# Altium PCB PCB1.pcbdoc
Units mil, origin at the board's own origin, x right, y up, seen from the top; angles counter-clockwise.
Board outline 3445.56 x 2675.56 mil, 2 copper layers (Top Layer, Bottom Layer); 55 components, 52 nets, 276 pads, 218 vias.
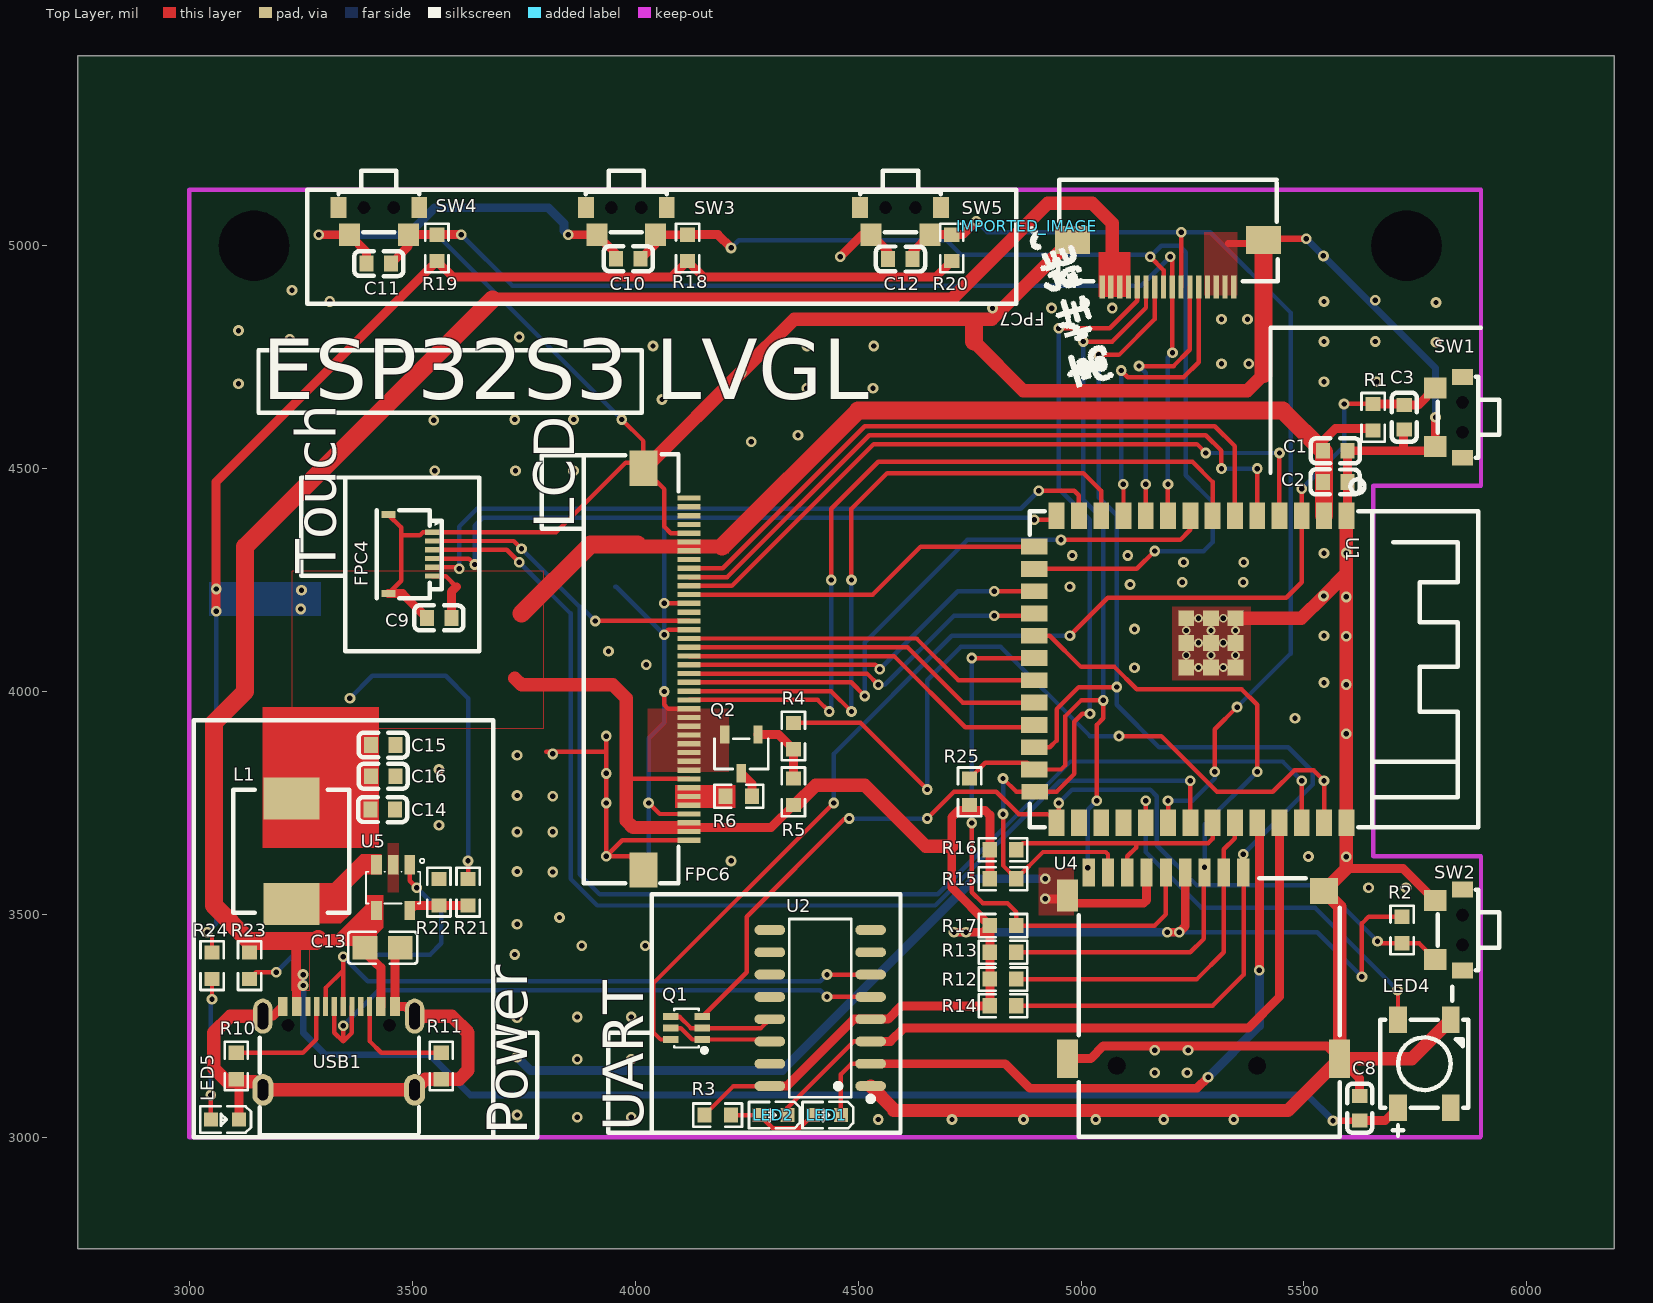
[diagram p0: Top Layer view]
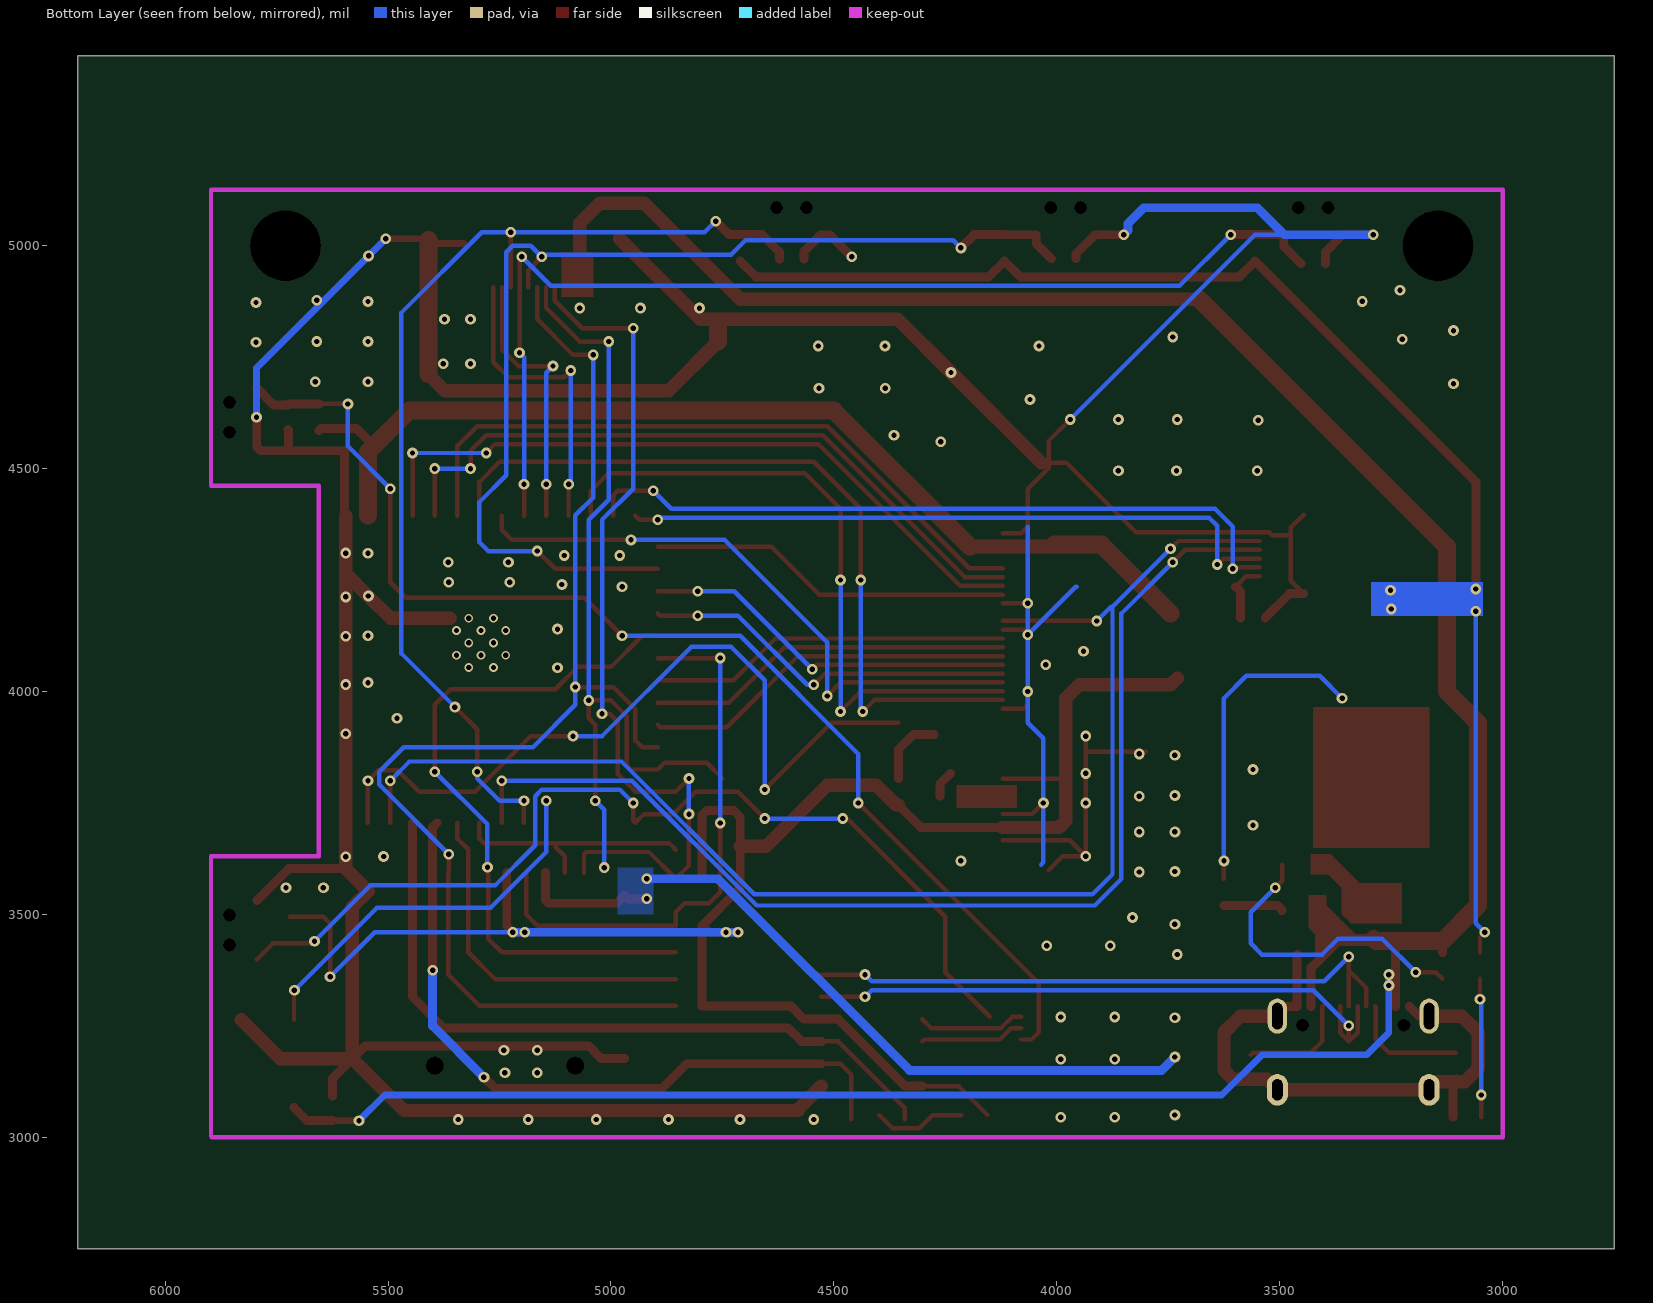
[diagram p1: Bottom Layer view, seen from below]

## Layer stack, top to bottom
Top Layer: signal copper (thickness not stored)
Dielectric: dielectric 12.6, FR-4, Dk 4.8
Bottom Layer: signal copper (thickness not stored)

## Board outline
6195.56,2750 2750,2750 2750,5425.56 6195.56,5425.56
cut-out: 3223.74,5000 ccw(c3145,5000) 3066.26,5000 ccw(c3145,5000)
cut-out: 5808.74,5000 ccw(c5730,5000) 5651.26,5000 ccw(c5730,5000)

## Components (designator, comment, footprint, x,y, rotation, side; value= is the part's Value field where it differs from the comment)
C1 "CC0603KRX7R9BB104" C0603 5570,4470 r0 top
C2 "CL10A226MP8NUNE" C0603 5570,4540 r180 top
C3 "CL10A105KB8NNNC" C0603 5725,4615 r270 top
C8 "CC0603KRX7R9BB104" C0603 5625,3065 r270 top
C9 "CC0603KRX7R9BB104" C0603 3560,4165 r0 top
C10 "CC0603KRX7R9BB104" C0603 3984.39,4970.64 r180 top
C11 "CC0603KRX7R9BB104" C0603 3424.7,4960 r180 top
C12 "CC0603KRX7R9BB104" C0603 4594.69,4970.21 r180 top
C13 "CL21A475KAQNNNE" C0805 3433.4,3425.21 r180 top
C14 "CL10A106MQ8NNNC" C0603 3433.71,3735 r0 top
C15 "CL10A226MQ8NRNC" C0603 3434.39,3880 r180 top
C16 "CL10A226MQ8NRNC" C0603 3434.39,3810 r180 top
FPC4 "HC-FPC-05-09-6RLTAG" FPC-SMD_6P-P0.50_HC-FPC-05-09-6RLTAG 3495.51,4308.07 r90 top
FPC6 "AFC01-S40FCA-00" FPC-SMD_P0.50-40P_FGS-XJ-H2.0 4069.51,4050 r90 top
FPC7 "AFC01-S16FCA-00" FPC-SMD_P0.50-16P_FGS-XJ-H2.0 5195,4960 r0 top
IMPORTED_IMAGE "IMPORTED_IMAGE" IMPORTED_IMAGE 4878.84,5043.78 r0 top
L1 "FXL0630-2R2-M" IND-SMD_L7.0-W6.6 3228.71,3641.61 r90 top
LED1 "NCD0603R1_C84263" LED0603-RD_RED 4430,3050 r180 top
LED2 "NCD0603R1_C84263" LED0603-RD_RED 4310,3050 r180 top
LED4 "XL-5050RGBC-WS2812B" LED-SMD_4P-L5.0-W5.0-BL_XL-5050RGBC 5770,3165 r0 top
LED5 "NCD0603R1_C84263" LED0603-RD_RED 3079.4,3040 r180 top
Q1 "2N7002DWH6327" SOT-363_L2.0-W1.3-P0.65-LS2.1-BR 4115,3245 r0 top
Q2 "S8050 J3Y_C2146" SOT-23-3_L3.0-W1.7-P0.95-LS2.9-BR 4238.08,3860 r90 top
R1 "0603WAF1002T5E" R0603 5655,4615 r90 top
R2 "0603WAF1002T5E" R0603 5720,3465 r270 top
R3 "0603WAF4701T5E" R0603 4185,3050 r0 top
R4 "0603WAF2200T5E" R0603 4355,3900 r270 top
R5 "0603WAF1002T5E" R0603 4355,3775 r270 top
R6 "0603WAF100KT5E" R0603 4232.53,3765 r180 top
R10 "0603WAF5101T5E" R0603 3105,3160 r270 top
R11 "0603WAF5101T5E" R0603 3565,3160 r270 top
R12 "0603WAF1002T5E" R0603 4825,3355 r180 top
R13 "0603WAF1002T5E" R0603 4825,3415 r180 top
R14 "0603WAF1002T5E" R0603 4825,3295 r180 top
R15 "0603WAF1002T5E" R0603 4825,3580 r180 top
R16 "0603WAF1002T5E" R0603 4825,3645 r180 top
R17 "0603WAF1002T5E" R0603 4825,3475 r180 top
R18 "0603WAF1002T5E" R0603 4117.27,4995 r90 top
R19 "0603WAF1002T5E" R0603 3555,4995 r90 top
R20 "0603WAF1002T5E" R0603 4710,4995 r90 top
R21 "0603WAF2003T5E" R0603 3625,3550 r90 top
R22 "0603WAF4422T5E" R0603 3559.7,3550 r270 top
R23 "0603WAF1002T5E" R0603 3135,3385 r90 top
R24 "0603WAF1002T5E" R0603 3050.71,3385 r270 top
R25 "0603WAF1002T5E" R0603 4750,3775 r90 top
SW1 "TS24CA" SW-SMD_TS24CA#1 5825,4615 r270 top
SW2 "TS24CA" SW-SMD_TS24CA#1 5825,3465 r270 top
SW3 "TS24CA" SW-SMD_TS24CA#2 3980,5055 r0 top
SW4 "TS24CA" SW-SMD_TS24CA#2 3425,5055 r0 top
SW5 "TS24CA" SW-SMD_TS24CA#2 4595,5055 r0 top
U1 "ESP32-S3-WROOM-1-N16R8" WIRELM-SMD_ESP32-S3-WROOM-1 5245,4050 r270 top
U2 "CH340C" SOP-16_L10.0-W3.9-P1.27-LS6.0-BL 4415,3290 r90 top
U4 "XDFP-0090-012" SIM-SMD_LX_XDFP-0090-012 5275,3385 r0 top
U5 "TLV62569DBVR" SOT-23-5_L3.0-W1.7-P0.95-LS2.8-BR 3457.03,3560 r90 top
USB1 "TYPE-C 16PIN 2MD(073)" USB-C-SMD_TYPE-C-6PIN-2MD-073 3335,3200 r0 top

## Footprints (in the part's own frame and the unit in brackets; to place one, negate y for a bottom-side part, rotate by r counter-clockwise, add the part's x,y. Pads: shape width x height; smd on the part's side, far side on the other; paste and mask are expansions set on the pad)
C0603 [mm]
  rect 0.8x0.9 smd: 1(-0.7,0) 2(0.7,0)
  silkscreen extent -1.41,-0.71 1.39,0.72
C0805 [mm]
  rect 1.41x1.35 smd: 1(-1,0) 2(1,0)
  silkscreen extent -1.96,-0.9 1.96,0.9
FPC-SMD_6P-P0.50_HC-FPC-05-09-6RLTAG [mm]
  rect 0.3x0.8 smd: 1(1.25,-1.25) 2(0.75,-1.25) 3(0.25,-1.25) 4(-0.25,-1.25) 5(-0.75,-1.25) 6(-1.25,-1.25)
  rect 0.4x0.8 smd: 7(-2.25,1.25) 8(2.25,1.25)
  silkscreen extent -2.5,-1.78 2.5,1.91
FPC-SMD_P0.50-16P_FGS-XJ-H2.0 [mm]
  rect 0.3x1.3 smd: 1(-3.752,-1.34) 2(-3.254,-1.338) 3(-2.752,-1.34) 4(-2.252,-1.34) 5(-1.752,-1.34) 6(-1.252,-1.34) 7(-0.752,-1.34) 8(-0.252,-1.34) 9(0.248,-1.34) 10(0.748,-1.34) 11(1.248,-1.34) 12(1.748,-1.34) 13(2.248,-1.34) 14(2.748,-1.34) 15(3.248,-1.34) 16(3.748,-1.34)
  rect 2x1.6 smd: 17(-5.45,1.34) 18(5.45,1.34)
  silkscreen extent -6.25,-2.4 6.25,4.76
FPC-SMD_P0.50-40P_FGS-XJ-H2.0 [mm]
  rect 0.3x1.3 smd: 1(9.75,-1.3) 2(9.25,-1.3) 3(8.75,-1.3) 4(8.25,-1.3) 5(7.75,-1.3) 6(7.25,-1.3) 7(6.75,-1.3) 8(6.25,-1.3) 9(5.75,-1.3) 10(5.25,-1.3) 11(4.75,-1.3) 12(4.25,-1.3) 13(3.75,-1.3) 14(3.25,-1.3) 15(2.75,-1.3) 16(2.25,-1.3) 17(1.75,-1.3) 18(1.25,-1.3) 19(0.75,-1.3) 20(0.25,-1.3) 21(-0.25,-1.3) 22(-0.75,-1.3) 23(-1.25,-1.3) 24(-1.75,-1.3) 25(-2.25,-1.3) 26(-2.75,-1.3) 27(-3.25,-1.3) 28(-3.75,-1.3) 29(-4.25,-1.3) 30(-4.75,-1.3) 31(-5.25,-1.3) 32(-5.75,-1.3) 33(-6.25,-1.3) 34(-6.75,-1.3) 35(-7.25,-1.3) 36(-7.75,-1.3) 37(-8.25,-1.3) 38(-8.75,-1.3) 39(-9.25,-1.3) 40(-9.75,-1.3)
  rect 2x1.6 smd: 41(-11.45,1.3) 42(11.45,1.3)
  silkscreen extent -12.2,-0.7 12.25,4.7
IMPORTED_IMAGE [mil]
  silkscreen extent 0,-363 194,0
IND-SMD_L7.0-W6.6 [mm]
  rect 2.4x3.2 smd: 1(-3,0) 2(3,0)
  silkscreen extent -3.5,-3.3 3.5,3.3
LED0603-RD_RED [mm]
  rect 0.8x0.8 smd: 1(-0.8,-0.003) 2(0.8,0.003)
  silkscreen extent -1.49,-0.75 1.39,0.76
LED-SMD_4P-L5.0-W5.0-BL_XL-5050RGBC [mm]
  rect 1x1.5 smd: 1(-1.5,-2.5) 2(1.5,-2.5) 3(1.5,2.5) 4(-1.5,2.5)
  silkscreen extent -2.5,-4.1 2.5,4.4
R0603 [mil]
  rect 31.75x34.02 smd: 1(-29.66,0) 2(29.66,0)
  silkscreen extent -55,-26 55,26
SIM-SMD_LX_XDFP-0090-012 [mm]
  rect 0.7x1.6 smd: 1(2.25,5.3) 2(1.15,5.3) 3(0.05,5.3) 4(-1.05,5.3) 5(-2.15,5.3) 6(-3.25,5.3) 7(-4.35,5.3) 8(-5.45,5.3) 9(-6.55,5.3)
  rect 1.2x2.2 smd: 10(-7.75,-5.3) 10(7.75,-5.3)
  rect 1.2x1.8 smd: 10(-7.75,4)
  rect 1.6x1.5 smd: 10(6.85,4.25)
  Multi-Layer board cut-out: 3.55,-5.7 3.501,-5.483 3.362,-5.309 3.161,-5.212 2.939,-5.212 2.738,-5.309 2.6,-5.483 2.55,-5.7 2.55,-5.7 2.6,-5.917 2.738,-6.091 2.939,-6.187 3.161,-6.187 3.362,-6.091 3.501,-5.917 3.55,-5.7
  Multi-Layer board cut-out: -4.45,-5.7 -4.499,-5.483 -4.638,-5.309 -4.839,-5.212 -5.061,-5.212 -5.262,-5.309 -5.4,-5.483 -5.45,-5.7 -5.45,-5.7 -5.4,-5.917 -5.262,-6.091 -5.061,-6.187 -4.839,-6.187 -4.638,-6.091 -4.499,-5.917 -4.45,-5.7
  silkscreen extent -7.11,-9.74 7.74,4.99
SOP-16_L10.0-W3.9-P1.27-LS6.0-BL [mm]
  oval 0.56x1.745 smd: 1(-4.445,-2.872) 2(-3.175,-2.872) 3(-1.905,-2.872) 4(-0.635,-2.872) 5(0.635,-2.872) 6(1.905,-2.872) 7(3.175,-2.872) 8(4.445,-2.872) 9(4.445,2.872) 10(3.175,2.872) 11(1.905,2.872) 12(0.635,2.872) 13(-0.635,2.872) 14(-1.905,2.872) 15(-3.175,2.872) 16(-4.445,2.872)
  silkscreen extent -5.33,-3.02 5.08,1.77
SOT-23-3_L3.0-W1.7-P0.95-LS2.9-BR [mil]
  rect 40.85x20.95 smd: 1(43.36,-37.4) 2(43.36,37.4) 3(-43.36,0)
  silkscreen extent -34,-60 34,60
SOT-23-5_L3.0-W1.7-P0.95-LS2.8-BR [mm]
  rect 1.1x0.6 smd: 1(1.3,-0.95) 2(1.3,0) 3(1.3,0.95) 4(-1.3,0.95) 5(-1.3,-0.95)
  silkscreen extent -0.9,-1.78 1.65,1.55
SOT-363_L2.0-W1.3-P0.65-LS2.1-BR [mm]
  rect 0.9x0.4 smd: 1(0.9,-0.65) 2(0.9,0) 3(0.9,0.65) 4(-0.9,0.65) 5(-0.9,0) 6(-0.9,-0.65)
  silkscreen extent -0.7,-1.4 1.14,1.1
SW-SMD_TS24CA#1 [mm]
  rect 0.9x1.2 smd: 1(-2.3,0.775) 2(2.3,0.775)
  rect 1.2x1.3 smd: 3(-1.675,-0.775) 4(1.675,-0.775)
  Multi-Layer board cut-out: -0.85,1.125 -1.002,1.09 -1.124,0.993 -1.191,0.853 -1.191,0.697 -1.124,0.557 -1.002,0.46 -0.85,0.425 -0.85,0.425 -0.698,0.46 -0.576,0.557 -0.509,0.697 -0.509,0.853 -0.576,0.993 -0.698,1.09 -0.85,1.125
  Multi-Layer board cut-out: 0.85,1.125 0.698,1.09 0.576,0.993 0.509,0.853 0.509,0.697 0.576,0.557 0.698,0.46 0.85,0.425 0.85,0.425 1.002,0.46 1.124,0.557 1.191,0.697 1.191,0.853 1.124,0.993 1.002,1.09 0.85,1.125
  silkscreen extent -2.3,-0.62 2.3,2.88
SW-SMD_TS24CA#2 [mm]
  rect 0.9x1.2 smd: 1(-2.3,0.775) 2(2.3,0.775)
  rect 1.2x1.3 smd: 3(-1.675,-0.775) 4(1.675,-0.775)
  Multi-Layer board cut-out: -0.5,0.775 -0.535,0.927 -0.632,1.049 -0.772,1.116 -0.928,1.116 -1.068,1.049 -1.165,0.927 -1.2,0.775 -1.2,0.775 -1.165,0.623 -1.068,0.501 -0.928,0.434 -0.772,0.434 -0.632,0.501 -0.535,0.623 -0.5,0.775
  Multi-Layer board cut-out: 1.2,0.775 1.165,0.927 1.068,1.049 0.928,1.116 0.772,1.116 0.632,1.049 0.535,0.927 0.5,0.775 0.5,0.775 0.535,0.623 0.632,0.501 0.772,0.434 0.928,0.434 1.068,0.501 1.165,0.623 1.2,0.775
  silkscreen extent -2.3,-0.62 2.3,2.88
USB-C-SMD_TYPE-C-6PIN-2MD-073 [mm]
  rect 0.55x1.1 smd: 1(-3.2,2.375) 2(-2.4,2.375) 11(2.4,2.375) 12(3.2,2.375)
  rect 0.3x1.1 smd: 3(-1.75,2.375) 4(-1.25,2.375) 5(-0.75,2.375) 6(-0.25,2.375) 7(0.25,2.375) 8(0.75,2.375) 9(1.25,2.375) 10(1.75,2.375)
  oval 1.1x2 hole 0.6 slot 1.5 at 90 deg: 13(-4.325,1.825) 14(4.325,1.825)
  oval 1.2x1.8 hole 0.6 slot 1.2 at 90 deg: 13(-4.325,-2.375) 14(4.325,-2.375)
  Multi-Layer board cut-out: -2.54,1.305 -2.575,1.457 -2.672,1.579 -2.812,1.646 -2.968,1.646 -3.108,1.579 -3.205,1.457 -3.24,1.305 -3.24,1.305 -3.205,1.153 -3.108,1.031 -2.968,0.964 -2.812,0.964 -2.672,1.031 -2.575,1.153 -2.54,1.305
  Multi-Layer board cut-out: 3.24,1.305 3.205,1.457 3.108,1.579 2.968,1.646 2.812,1.646 2.672,1.579 2.575,1.457 2.54,1.305 2.54,1.305 2.575,1.153 2.672,1.031 2.812,0.964 2.968,0.964 3.108,1.031 3.205,1.153 3.24,1.305
  silkscreen extent -4.5,-4.97 4.57,0.6
WIRELM-SMD_ESP32-S3-WROOM-1 [mm]
  rect 1.5x0.9 smd: 1(-8.75,8.895) 2(-8.75,7.625) 3(-8.75,6.355) 4(-8.75,5.085) 5(-8.75,3.815) 6(-8.75,2.545) 7(-8.75,1.275) 8(-8.75,0.005) 9(-8.75,-1.265) 10(-8.75,-2.535) 11(-8.75,-3.805) 12(-8.75,-5.075) 13(-8.75,-6.345) 14(-8.75,-7.615) 27(8.75,-7.615) 28(8.75,-6.345) 29(8.75,-5.075) 30(8.75,-3.805) 31(8.75,-2.535) 32(8.75,-1.265) 33(8.75,0.005) 34(8.75,1.275) 35(8.75,2.545) 36(8.75,3.815) 37(8.75,5.085) 38(8.75,6.355) 39(8.75,7.625) 40(8.75,8.895)
  rect 0.9x1.5 smd: 15(-6.985,-8.895) 16(-5.715,-8.895) 17(-4.445,-8.895) 18(-3.175,-8.895) 19(-1.905,-8.895) 20(-0.635,-8.895) 21(0.635,-8.895) 22(1.905,-8.895) 23(3.175,-8.895) 24(4.445,-8.895) 25(5.715,-8.895) 26(6.985,-8.865)
  rect 0.9x0.9 smd: 41(-2.9,1.175) 41(-2.9,2.575) 41(-2.9,-0.225) 41(-1.5,2.575) 41(-1.5,1.175) 41(-1.5,-0.225) 41(-0.1,2.575) 41(-0.1,1.175) 41(-0.1,-0.225)
  silkscreen extent -10.82,-9.14 9.02,16.39

## Via types
v1: diameter 24.02, hole 12.01, Top Layer to Bottom Layer, 206 vias
v2: diameter 19.69, hole 11.81, Top Layer to Bottom Layer, 12 vias

## Nets (pads, with @x,y where several pads share a name; then routed paths per layer and width w, separated by ;. In a path a pad name is that pad's centre, name@x,y a point inside that pad or via, vN(x,y) a via of type N, cw(c..) or ccw(c..) an arc to the next point about the centre after c; other vN are vias at no path point)
3V3: C1.1 C2.2 C9.2 C14.1 C15.2 C16.2 FPC4.6 FPC6.6 FPC6.7 FPC6.33 FPC6.38 FPC6.39 L1.2 R1.1 R2.1 R3.1 R5.2 R12.2 R13.2 R14.2 R15.2 R16.2 R17.2 R18.1 R19.1 R20.1 R21.2 R24.1 R25.1 U1.2 U2.4 U2.16 U4.4 | length 10330.2
  Top Layer w10: v1(3040,3460) 3050.71,3449.29 R24.1 ; FPC4.6 3575,4258.85 3598.86,4235 ; R21.2 v1(3625,3620) ; 3990,3803.94 FPC6.33 ; R3.1 4220.34,3115 U2.16 ; v1(5630,3360) 5630,3479.66 5645,3494.66 R2.1
  Top Layer w20: v1(3060,4180) v1(3060,4230) 3060,4470.34 R19.1 3590.34,4930 4081.93,4930 R18.1 4152.61,4930 4674.66,4930 R20.1 ; C9.2 3587.56,4223.7 3598.86,4235 ; 4122.15,3695 4304.66,3695 R5.2 ; U2.16 4340,3115 4490,3265 U2.4 4567.14,3265 4597.14,3295 R14.2 R12.2 R13.2 R17.2 ; v1(4715,3460) v1(4741.9,3460) 4780.34,3460 R17.2 ; R15.2 R16.2 4795.34,3722.67 4785,3733.01 4725,3733.01 4710,3718.01 4710,3653.19 4710,3560.34 R17.2 ; v1@5195,3460 v1(5220,3460) 5233.66,3473.66 U4.4 ; C2.2 5542.44,4561.38 5571.06,4590 5650.34,4590 R1.1
  Top Layer w30: 3730,4030 3745,4015 3950,4015 3980,3985 3980,3710 3995,3695 4122.15,3695 ; R5.2 4360.34,3745.34 4405,3790 4515,3790 4651.81,3653.19 4710,3653.19
  Top Layer w40: 3745,4175 3900,4330 4005,4330 ; 4195,4325 4500,4630 5452.44,4630 C2.2 5545.19,4537.24 U1.2
  Bottom Layer w10: v1(3040,3460) 3060,3480 v1(3060,4180) ; v1(3360,3985) 3410,4035 3575,4035 3625,3985 v1(3625,3620) ; v1(5220,3460) 5530,3460 v1(5630,3360)
  Bottom Layer w20: v1(4715,3460) v1(4741.9,3460) v1(5193.5,3460) v1(5220,3460)
  other v1: 3250,4185 3251.31,4227.34
$1N3136: LED1.2 LED2.2 R3.2 | length 208.7
  Top Layer w10: R3.2 4214.8,3049.86 LED2.2 4308.39,3020 4368.66,3020 LED1.2
$1N4482: Q2.3 R6.1 | length 61.6
  Top Layer w20: Q2.3 4262.19,3792.54 R6.1
$1N4584: Q2.1 R4.2 R5.1 | length 158.9
  Top Layer w20: Q2.1 4321.98,3903.36 R4.2 R5.1
$1N6260: R10.1 USB1.4 | length 266.4
  Top Layer w10: R10.1 3254.66,3189.66 3285,3220 3285,3292.71 USB1.4
$1N6275: R11.1 USB1.10 | length 251.5
  Top Layer w10: USB1.10 3405,3292.41 3405,3215 3430,3190 3559.66,3190 R11.1@3565,3184.66
$1N13069: L1.1 U5.3
$1N13305: R23.1 U5.1 | length 697.4
  Top Layer w10: R23.1 3149.66,3370 v1(3195,3370) ; U5.1 3494.43,3575.57 v1(3510,3560)
  Bottom Layer w10: v1(3195,3370) 3270,3445 3370,3445 3405,3410 3540,3410 3565,3435 3565,3505 v1(3510,3560)
$1N13462: LED5.2 R24.2 | length 311.6
  Top Layer w10: LED5.2@3047.93,3044.86 v1(3047.93,3095) ; v1(3050.71,3310) R24.2
  Bottom Layer w10: v1(3047.93,3095) 3047.93,3307.21 v1(3050.71,3310)
$1N13468: R21.1 R22.2 U5.5 | length 135.3
  Top Layer w20: U5.5 3505.95,3520.34 R22.2 R21.1
+5V: C8.2 C13.2 FPC7.1 FPC7.2 FPC7.3 FPC7.4 LED4.1 R23.2 U5.4 USB1.2 USB1.11 | length 6639
  Top Layer w15: v1(5565,3037.44) C8.2
  Top Layer w20: R23.2 3135,3440 ; 3240,3440 3240,3294.02 USB1.2 ; 3289.05,3445 3365,3445 3429.49,3380.51 USB1.11 ; C8.2 5681.81,3037.44 LED4.1
  Top Layer w30: 3680,4880 4710,4880 4925,5095 5025,5095 5070,5050 5070,4910 5075,4905
  Top Layer w40: 3289.05,3445 3284.05,3440 3240,3440 3135,3440 3055,3520 3055,3930 3125,4000 3125,4325 3680,4880
  Bottom Layer w15: v1(3255,3365) v1(3255,3340.67) 3255,3235 3305,3185 3540,3185 3630,3095 5507.44,3095 v1(5565,3037.44)
DN: U2.6 USB1.5 USB1.7 | length 1420.8
  Top Layer w10: USB1.5 3305.47,3335 3344.84,3374.37 ; USB1.7 3344.84,3374.37 ; v1(3345,3405) 3345,3374.53 3344.84,3374.37 ; v1(4430,3365) U2.6
  Bottom Layer w10: v1(3345,3405) 3400,3350 4415,3350 v1(4430,3365)
DP: U2.5 USB1.6 USB1.8 | length 1430.8
  Top Layer w10: USB1.6 3325.16,3234.84 3345,3215 ; v1(3345,3250) 3345,3215 ; USB1.8 3364.53,3234.53 3345,3215 ; v1(4430,3315) U2.5
  Bottom Layer w10: v1(3345,3250) 3425,3330 4415,3330 v1(4430,3315)
DTR: Q1.2 Q1.4 U2.13 | length 241.2
  Top Layer w10: Q1.4 4099.41,3270.59 4125,3245 Q1.2 4281.91,3245 U2.13
EN: C3.1 Q1.6 R1.2 SW1.3 U1.3 | length 2708.4
  Top Layer w10: Q1.6 4056.85,3219.41 4040,3236.26 4040,3345 v1(4445,3750) ; v1(4975,4125) 5060,4210 5460,4210 5495,4245 5495,4394.3 U1.3 5495,4394.69 v1(5495,4455) ; v1(5590,4645) 5654.66,4645 R1.2
  Top Layer w20: R1.2 5722.9,4644.66 C3.1 5756.11,4642.56 SW1.3
  Bottom Layer w10: v1(4445,3750) 4445,3860 4710,4125 v1(4975,4125) ; v1(5495,4455) 5590,4550 v1(5590,4645)
GND: C1.2 C2.1 C3.2 C8.1 C9.1 C10.2 C11.2 C12.2 C13.1 C14.2 C15.1 C16.1 FPC4.1 FPC4.7 FPC4.8 FPC6.5 FPC6.13 FPC6.16 FPC6.25 FPC6.26 FPC6.27 FPC6.28 FPC6.29 FPC6.30 FPC6.31 FPC6.32 FPC6.37 FPC6.40 FPC6.41 FPC6.42 FPC7.13 FPC7.14 FPC7.15 FPC7.16 FPC7.17 FPC7.18 LED4.3 LED5.1 Q2.2 R10.2 R11.2 R22.1 SW1.4 SW2.3 SW3.3 SW4.3 SW5.3 U1.1 U1.40 U1.41 U2.1 U4.6 U4.10 U5.2 USB1.1 USB1.12 USB1.13 USB1.14 | length 15242.4
  Top Layer w10: FPC4.7 3475,4248.19 3475,4350 ; FPC4.8 3475,4367.95 3475,4350 ; 3800,3864.64 3935,3864.64 ; v1(3935,3900) 3935,3864.64 ; v1(3970,4610) 4018.33,4561.67 FPC6.42@4018.33,4513.29 ; FPC6.41 3987.36,3630.18 v1(3935,3630.18) ; v1(4030,3750) 4054.8,3725.2 FPC6.37 ; FPC6.42@4034.88,4513.29 FPC6.42@4018.33,4513.29 ; v1(4065,4000) 4065,3970 4073.58,3961.42 FPC6.25 ; v1@4065,4130 4073.58,4138.58 FPC6.16 ; v1(4065,4197.62) FPC6.13 ; FPC6.40 3970.96,3666.14 v1(3935,3630.18) ; FPC6.5 4079.88,4355.12 4065,4370 4065,4454.12 FPC6.42 FPC6.42@4018.33,4513.29 ; 3475,4350 3516.69,4350 3523.98,4357.28 FPC4.1 3822.28,4357.28 3978.29,4513.29 FPC6.42@4018.33,4513.29 ; v1(3935,3630.18) v1(3935,3750) v1(3935,3816.25) 3935,3864.64
  Top Layer w15: 5330,5005 5398.49,5005 5409.18,5015.69 v1(5505,5015.69)
  Top Layer w20: R10.2 3110.34,3125 3110.89,3124.45 LED5.1@3110.89,3045.13 ; USB1.13@3164.72,3271.86 3187.36,3271.86 USB1.1 ; v1(3290,5024.49) SW4.3 3397.14,4986.41 C11.2 ; FPC4.7 3477.95,4219.48 C9.1 ; C13.1@3460,3410 3460.99,3409.01 USB1.12 3483.62,3293.51 USB1.14@3505.28,3271.86 ; v1(3850,5024.49) SW3.3 3956.83,4981.72 C10.2 ; v1(4460,4975) 4509.49,5024.49 SW5.3 4567.14,4986.41 C12.2 ; v1(4920,3535) 4962.4,3535 4969.88,3542.49 4987.36,3525 5140,3525 5147.05,3532.05 U4.6 ; U4.10@4969.88,3176.34 5021.34,3176.34 5050,3205 5551.45,3205 5580.12,3176.34 5625,3131.45 C8.1 ; 5595.19,3602.83 5722.6,3602.83 SW2.3 ; U1.1 5597.56,4396.85 C1.2 C2.1 5723.36,4540 ; C3.2 5723.36,4585.8 5723.36,4540 ; v1(5795,4615) 5794.49,4614.49 SW1.4 5785.44,4540 5723.36,4540
  Top Layer w30: USB1.13@3164.72,3271.86 3091.86,3271.86 3055,3235 3055,3155 3085,3125 3110.34,3125 3146.22,3125 3164.72,3106.49 3505.28,3106.49 3528.78,3130 3605,3130 3625,3150 3625,3235 3588.14,3271.86 USB1.14@3505.28,3271.86 ; FPC6.42@4034.88,4513.29 v1(4237.15,4715.56) 4356.59,4835 4800.14,4835 FPC7.17@4980.83,5015.69 ; U2.1 4580,3063.09 4580,3060 5463.78,3060 U4.10@5580.12,3176.34 ; 4760,4785 4870,4675 5373,4675 5409.56,4711.56 ; U1.41@5360.18,4164.18 5494.18,4164.18 v1(5544.06,4214.06) 5595.19,4265.19 ; 5595.19,4332.64 v1(5595.19,4310.46) ; U1.1 v1(5595.19,4310.46) ; LED4.3 5741.96,3176.34 U4.10@5580.12,3176.34 ; U4.10@5580.12,3176.34 5580.12,3516.89 5544.69,3552.32 5595.19,3602.83 v1(5595.19,3629.14) U1.40 v1(5595.19,3905.03) v1(5595.19,4015.47) v1(5595.19,4123.63) v1(5595.19,4212.13) 5595.19,4265.19 ; 5595.19,4265.19 v1(5595.19,4310.46)
  Top Layer w40: 4760,4785 4760,4820 ; 5409.56,4711.56 FPC7.18
  Bottom Layer w10: 3489.49,5024.49 3555.51,5024.49 v1(3970,4610) ; 3955,4235 3957.15,4235 v1(4065,4127.15) ; 4034.88,3611.71 4030,3616.59 v1(4030,3750) 4030,3894.86 4065,3929.86 v1(4065,4000) v1(4065,4127.15) ; 4065,4370 v1(4065,4197.62) v1(4065,4127.15)
  Bottom Layer w15: v1(5505,5015.69) v1(5543.68,4977.01) 5795,4725.69 v1(5795,4615)
  Bottom Layer w20: v1(3290,5024.49) 3489.49,5024.49 3550,5085 3805,5085 3840,5050 3840,5034.49 v1(3850,5024.49) ; v1(3735,3180) 3765,3150 4330,3150 4760,3580 v1(4920,3580)
  other v1: 4545,3040 4710.63,3040 4870.99,3040 5032.86,3040 5185.65,3040 5342.23,3040 3870,3045 3991.22,3045 3735,3050 5165,3145 5237.84,3145 3870,3175 3991.22,3175 5165,3195 5240.11,3195 3735,3268.45 3870,3270 3991.22,3270 3730,3410 3880,3430 4022.27,3430 3735,3478.08 3830,3493.09 5645,3560 5728.75,3560 3815,3595 3735,3596.18 4215,3620 5510,3630 3735,3685 3815,3685 3560,3700 3815,3765 3735,3766.76 3560,3825 3735,3856.76 3815,3860 5480,3940 5545,4020 5120,4053.33 4025,4060 3940,4090 5545,4125 5120,4140 4975,4235 5110,4240 5226.97,4245 5363.57,4245 5230,4290 5365,4290 4980,4305 5105,4305 5545,4310 3550,4495 3731.36,4495 3861.76,4495 4260,4560 4365,4575 3548.36,4608.71 3730,4610 3861.76,4610 4060,4655 4385,4680 4533.24,4680 3110,4690 5545,4695 5663.03,4695 5315,4735 5376.01,4735 4040,4775 4385.25,4775 4535,4775 5796.16,4783.21 5545,4785 5660,4785 3225,4790 3740,4795 3110,4809.54 5315,4835 5373.52,4835 4801.48,4860 4933.95,4860 5070,4860 5796.16,4872.47 3315,4875 5545,4874.74 5660,4877.76 3230,4900
IO0: Q1.3 R2.2 SW2.4 U1.27 | length 2221.2
  Top Layer w10: Q1.3 4250,3370.17 4250,3495 v1@4470,3715 ; v1(4655,3715) 4715,3775 4810,3775 4860,3725 4925.7,3725 U1.27 4950,3710.32 v1(4950,3750) ; v1(5665,3440) 5669.66,3435.34 R2.2 5758.2,3435.34 SW2.4
  Bottom Layer w10: v1(4480,3715) v1(4655,3715) ; v1(4950,3750) 4980,3780 5155,3780 5170,3765 5170,3655 5260,3565 5540,3565 v1(5665,3440)
IO1: R4.1 U1.39 | length 1786.7
  Top Layer w10: R4.1 4505.34,3929.66 v1(4655,3780) ; v1(5085,3900) 5180,3900 5305,3775 5430,3775 5478.01,3823.01 5521.99,3823.01 v1(5545,3800) 5545.19,3799.8 U1.39
  Bottom Layer w10: v1(4655,3780) 4655,4025 4730,4100 4820,4100 5020,3900 v1(5085,3900)
IO2: FPC4.2 FPC6.15 U1.38 | length 3124.7
  Top Layer w10: FPC4.2 3727.41,4337.6 v1(3745,4320) ; v1(3910,4158.27) FPC6.15 ; v1(5495.04,3800) 5495.04,3705.66 U1.38
  Bottom Layer w10: v1(3745,4320) 3875,4190 ; v1(3910,4158.27) 3878.27,4190 3875,4190 ; v1(5495.04,3800) 5451.99,3843.01 4976.34,3843.01 4678.33,3545 3920,3545 3875,3590 3875,4190
IO3: FPC6.12 U1.15 | length 818.7
  Top Layer w10: FPC6.12 4532.32,4217.32 4640,4325 U1.15
IO4: FPC6.11 U1.4 | length 1604.9
  Top Layer w10: FPC6.11 4217.01,4237.01 4535,4555 5260,4555 v1(5280,4535) ; v1(5445,4535) 5445,4394.69 U1.4
  Bottom Layer w10: v1(5280,4535) v1(5445,4535)
IO5: FPC6.10 U1.5 | length 1566.2
  Top Layer w10: FPC6.10 4206.69,4256.69 4525,4575 5280,4575 5315,4540 v1(5315,4500) ; v1(5395,4500) 5395,4394.69 U1.5
  Bottom Layer w10: v1(5315,4500) v1(5395,4500)
IO6: FPC6.9 U1.6 | length 1530.5
  Top Layer w10: FPC6.9 4196.38,4276.38 4515,4595 5300,4595 5345.19,4549.81 U1.6
IO7: FPC6.24 U1.7 | length 1774.9
  Top Layer w10: FPC6.24 4408.9,3981.1 v1(4435,3955) ; v1(4440,4250) 4440,4410 4545,4515 5250,4515 5295,4470 5295,4394.69 U1.7
  Bottom Layer w10: v1(4435,3955) 4440,3960 v1(4440,4250)
IO8: FPC6.23 U1.12 | length 1503.6
  Top Layer w10: FPC6.23 4439.21,4000.79 v1(4485,3955) ; v1(4485,4250) 4485,4410 4565,4490 5005,4490 5045.19,4449.81 U1.12
  Bottom Layer w10: v1(4485,3955) v1(4485,4250)
IO9: FPC6.20 U1.17 | length 850.7
  Top Layer w10: FPC6.20 4538.73,4059.84 v1(4548.57,4050) ; v1(4805,4225) U1.17
  Bottom Layer w10: v1(4548.57,4050) 4723.57,4225 v1(4805,4225)
IO10: FPC6.21 U1.18 | length 850.8
  Top Layer w10: FPC6.21 4519.84,4040.16 v1(4545,4015) ; v1(4805,4170) 4889.81,4170 U1.18
  Bottom Layer w10: v1(4545,4015) 4560,4015 4715,4170 v1(4805,4170)
IO11: R13.1 U1.19 U4.3 | length 1559.5
  Top Layer w10: R13.1 5245,3415 5275,3445 5275,3591.69 U4.3 ; U1.19 4930,4125 5000,4055 5075,4055 5125,4005 5360,4005 5395,3970 v1(5395,3820)
  Bottom Layer w10: v1(5276.97,3605.99) 5276.97,3701.97 v1(5395,3820)
IO12: R17.1 U1.20 U4.5 | length 1247.5
  Top Layer w10: v1(4755,3705) 4755,3550 4780,3525 4835,3525 4854.66,3505.34 R17.1 ; v1(4755,4075) U1.20 ; R17.1@4860,3475 5165,3475 5190.35,3500.35 U4.5
  Bottom Layer w10: v1(4755,3705) v1(4755,4075)
IO13: FPC6.17 U1.21 | length 813
  Top Layer w10: FPC6.17 4631.1,4118.9 4725,4025 U1.21
IO14: FPC6.18 U1.22 | length 825.6
  Top Layer w10: FPC6.18 4610.79,4099.21 4735,3975 U1.22
IO15: FPC6.22 U1.8 | length 1393.7
  Top Layer w10: FPC6.22 4484.53,4020.47 v1(4515,3990) ; v1(4955,4340) 5222.72,4340 5245.19,4362.47 U1.8
  Bottom Layer w10: v1(4515,3990) 4515,4110 4745,4340 v1(4955,4340)
IO16: C11.1 FPC7.9 R19.2 SW4.4 U1.9 | length 2450.9
  Top Layer w10: v1(5195,4465) 5195,4394.69 U1.9 ; v1(5200,4975) 5204.77,4970.23 FPC7.9 5205,4907.01 v1(5205,4760)
  Top Layer w20: C11.1 3490.95,4998.69 SW4.4 3491.12,5024.66 R19.2 v1(3610,5024.66)
  Bottom Layer w10: v1(3610,5024.66) 3724.66,4910 5135,4910 v1(5200,4975) ; v1(5195,4465) 5195,4750 v1(5205,4760)
IO17: FPC7.11 U1.10 | length 611.7
  Top Layer w10: v1(5130,4730) 5207.54,4730 5244.14,4766.6 FPC7.11 ; v1(5145,4465) 5145,4394.69 U1.10
  Bottom Layer w10: v1(5130,4730) 5145,4715 v1(5145,4465)
IO18: FPC7.12 U1.11 | length 683.1
  Top Layer w10: v1(5095,4465) 5095.19,4464.81 U1.11 ; v1@5095,4715 5105,4705 5230,4705 5263.81,4738.81 FPC7.12
  Bottom Layer w10: v1(5090,4720) 5090,4470 v1(5095,4465)
IO19: FPC4.5 U1.13 | length 1629.6
  Top Layer w10: FPC4.5 3601.45,4278.55 v1(3605,4275) ; v1(4905,4450) 4985,4450 4995,4440 4995,4394.69 U1.13
  Bottom Layer w10: v1(3605,4275) 3605,4370 3645,4410 4865,4410 v1(4905,4450)
IO20: FPC4.4 U1.14 | length 1506.2
  Top Layer w10: FPC4.4 3626.78,4298.23 v1(3640,4285) ; v1(4895,4385) 4935.7,4385 U1.14
  Bottom Layer w10: v1(3640,4285) 3640,4371.63 3658.37,4390 4890,4390 v1(4895,4385)
IO21: FPC6.19 U1.23 | length 842.3
  Top Layer w10: FPC6.19 4580.47,4079.53 4740,3920 4889.81,3920 U1.23
IO38: LED4.4 U1.31 | length 924.9
  Top Layer w10: v1(5145,3755) 5145,3705.7 U1.31 ; v1(5710,3330) 5710.95,3329.05 LED4.4
  Bottom Layer w10: v1(5145,3755) 5145,3640 5270,3515 5525,3515 v1(5710,3330)
IO39: C12.1 FPC7.10 R20.2 SW5.4 U1.32 | length 2390.3
  Top Layer w10: U1.32 v1(5195.19,3755) ; FPC7.10 5224.44,5029.44 v1(5225,5030) ; v1(5300,3820) 5300,3915 v1(5350,3965)
  Top Layer w20: C12.1 4622.26,4985.8 SW5.4 4661.12,5024.66 R20.2 4734.66,5024.66 v1(4765,5055)
  Bottom Layer w10: v1(4765,5055) 4790,5030 v1(5225,5030) 5290,5030 5470,4850 5470,4085 v1(5350,3965) ; v1(5195.19,3755) 5250,3755 5300,3805 v1(5300,3820)
IO40: FPC4.3 U1.33 | length 2589.9
  Top Layer w10: FPC4.3 3712.09,4317.91 v1(3740,4290) ; v1(5245,3800) 5245,3705.7 U1.33
  Bottom Layer w10: v1(3740,4290) 3855,4175 3855,3580 3915,3520 4673.13,3520 4953.13,3800 v1(5245,3800)
IO41: R16.1 U1.34 U4.7 | length 560.8
  Top Layer w10: R16.1 4869.66,3660 5123.58,3660 5285,3660 5295,3670 5295,3705.32 U1.34 ; U4.7 5103.74,3630.16 5123.58,3650 5123.58,3659.96
IO42: R12.1 U1.35 U4.2 | length 791.1
  Top Layer w10: R12.1 5260,3355 5320,3415 5320,3593.39 U4.2 5320.27,3646.06 5345.19,3670.98 U1.35
IO45: FPC7.5 R15.1 U1.26 U4.8 | length 1985.7
  Top Layer w10: v1(4825,3725) 4825,3609.66 R15.1 4914.66,3640 5055,3640 5060.43,3634.57 U4.8 ; v1(4825,3805) 4855,3775 U1.26 4945,3775 4985,3815 4985,3932.01 5002.99,3950 v1(5020,3950) ; v1(4950,4815) 5064.37,4815 5126.02,4876.65 FPC7.5
  Bottom Layer w10: v1(4825,3725) v1(4825,3805) ; v1(4950,4815) 4950,4455 5020,4385 v1(5020,3950)
IO46: C10.1 FPC7.8 R18.2 SW3.4 U1.16 | length 2481.3
  Top Layer w10: U1.16 5125,4275 v1(5165,4315) ; v1(5155,4975) 5185.07,4944.93 FPC7.8
  Top Layer w20: C10.1 4045.95,5004.64 SW3.4 4117.1,5024.49 R18.2 4185.34,5024.66 v1(4215,4995)
  Bottom Layer w10: v1(4215,4995) 4232.01,5012.01 4697.99,5012.01 4730,4980 v1@5150,4980 ; v1(5155,4975) 5180,5000 5220,5000 5235,4985 5235,4485 5295,4425 5295,4335 5275,4315 v1(5165,4315)
IO47: FPC7.7 R14.1 U1.24 U4.1 | length 2876.1
  Top Layer w10: R14.1 5295,3295 5365,3365 5365,3592.24 U4.1 v1(5363.58,3635) ; U1.24 4930,3875 4945,3890 4945,3960 4995,4010 v1(5080,4010) ; v1(5040,4755) 5085,4755 5165.4,4835.4 FPC7.7
  Bottom Layer w10: v1(5040,4755) 5040,4435 5080,4395 v1(5080,4010) 5080,3970 5175,3875 5465,3875 5520,3820 5520,3791.42 v1(5363.58,3635)
IO48: FPC7.6 R25.2 U1.25 U4.9 | length 1881.2
  Top Layer w10: R25.2 4785.34,3840 4879.81,3840 U1.25 4955,3825 4965,3835 4965,3945 5000,3980 v1(5050,3980) 5050,3940 5035,3925 v1(5035,3755) ; v1(5005,4785) 5070,4785 5145.7,4860.7 FPC7.6
  Bottom Layer w10: v1(5005,4785) 5005,4430 5050,4385 v1(5050,3980) ; v1(5015,3605) 5015,3735 v1(5035,3755)
LEDK: FPC6.34 FPC6.35 FPC6.36 R6.2
RTS: Q1.1 Q1.5 U2.14 | length 234.8
  Top Layer w10: Q1.5 4102.12,3245 4127.71,3219.41 Q1.1 4297.5,3219.41 U2.14
RXD: LED1.1 U1.36 U2.2 | length 1590
  Top Layer w10: LED1.1@4461.48,3040.13 4461.48,3141.48 4485,3165 U2.2
  Top Layer w20: U2.2 4830,3165 4885,3110 5260,3110 v1(5285,3135) ; U1.36@5390.19,3705.51 5400,3695.7 v1(5400,3375)
  Bottom Layer w20: v1(5285,3135) 5400,3250 v1(5400,3375)
TXD: LED2.1 U1.37 U2.3 | length 1623.4
  Top Layer w10: LED2.1@4341.48,3040.13 4341.48,3066.48 4490,3215 U2.3
  Top Layer w20: U2.3 4572.44,3215 4602.44,3245 5375,3245 5445.19,3315.2 U1.37
"": FPC6.1 FPC6.2 FPC6.3 FPC6.4 FPC6.8 FPC6.14 LED4.2 SW1.1 SW1.2 SW2.1 SW2.2 SW3.1 SW3.2 SW4.1 SW4.2 SW5.1 SW5.2 U1.28 U1.29 U1.30 U2.7 U2.8 U2.9 U2.10 U2.11 U2.12 U2.15 USB1.3 USB1.9
  other v2: 5263.7,4053.94 5318.81,4053.94 5236.14,4081.5 5291.26,4081.5 5346.37,4081.5 5263.7,4109.06 5318.81,4109.06 5236.14,4136.62 5291.26,4136.62 5346.37,4136.62 5263.7,4164.18 5318.81,4164.18

## Polygon pours and split planes (outlines as drawn)
GND on Top Layer (solid, remove dead copper, pour order 0): 3434.7,3020 3819.13,3020 3819.13,3965.22 3434.7,3965.22
3V3 on Top Layer (solid, remove dead copper, pour order 1): 3230,3917.46 3795,3917.46 3795,4270 3230,4270
+5V on Top Layer (solid, remove dead copper, pour order 2): 3228.58,3330 3270,3330 3270,3440 3228.58,3440
GND on Top Layer (solid, remove dead copper, pour order 3): 3005,3010 5845,3010 5845,5085 3005,5085
GND on Bottom Layer (solid, remove dead copper, pour order 4): 3005,3020 5845,3020 5845,5095 3005,5095

## Keep-outs
Board Outline Layer:
  lines w10 net "": 3000,3000 5895,3000 5897.09,3002.09 5897.09,3630 5655,3630 5655,4461.87 5897.09,4461.87 5897.09,5125 3000,5125 3000,3000

## Other copper
Top Layer:
  region net 3V3: 3165,3650 3425,3650 3425,3965 3165,3965
  region net 3V3: 3945,4310 4210,4310 4210,4340 3945,4340
  region net LEDK: 4090,3738.99 4224.41,3738.99 4224.41,3790 4090,3790
  region net +5V: 5040,4885 5110,4885 5110,4985 5040,4985
  region net $1N13069: 3430,3635 3385,3635 3320,3570 3226.7,3570 3226.7,3480.7 3339.3,3480.7 3340,3480 3360.52,3500.52 3360.52,3560 3390.52,3590 3430.26,3590 3430.26,3634.74
  region net +5V: 3250,3430 3365,3430 3415,3380 3420,3380 3420,3455 3435,3470 3435,3542.58 3397.42,3542.58 3395,3545 3395,3520 3330,3455 3250.8,3455 3250,3454.2
Bottom Layer:
  region net 3V3: 3045,4170 3295,4170 3295,4245 3045,4245

## Silkscreen, mask and mechanical layers (free items; w line width, h text height)
Top Silkscreen Layer:
  lines w10 net "": 5425,4490.83 5425,4816.2 5897.09,4816.2 ; 3350,4480 3650,4480 3650,4090 3350,4090 3350,4480 ; 3350,4480 3350,4260.07 3251.31,4260.07 3251.31,4480 3350,4480 ; 3681.16,3000 3010,3000 3010,3935.86 3681.16,3935.86 3681.16,3000 ; 3681.16,3000 3780,3000 3780,3235 3681.16,3235 3681.16,3000 ; 4037.32,3010 4595,3010 4595,3545 4037.32,3545 4037.32,3010 ; 4037.32,3010 3940,3010 3940,3235 4037.32,3235 4037.32,3010 ; 3155,4625 4015,4625 4015,4765 3155,4765 3155,4625 ; 3264.82,4870 4855,4870 4855,5125 3264.82,5125 3264.82,4870 ; 3790,4365 3884.47,4365 3884.47,4530.31 3790,4530.31 3790,4365
  text "ESP32S3 LVGL" at 3163.2,4655.08 h135.94
  text "LCD" at 3863.28,4365.1 h90.62 r90
  text "Touch" at 3328.28,4265.56 h90.62 r90
  text "UART" at 4018.01,3013.54 h90.62 r90
  text "Power" at 3758.28,3005.55 h90.62 r90
Mechanical Layer:
  circle w1 net "": c3145,5000 r78.74
  circle w1 net "": c5730,5000 r78.74